# Altium PCB Copy of main - shifted.PcbDoc (part 14 of 15)
Units mil, origin at the board's own origin, x right, y up, seen from the top; angles counter-clockwise.
Board outline 8394.55 x 5164.44 mil, 7 copper layers (Top Layer 1, Layer 2, Layer 3, Unused, Layer 4_pow, Layer 5_gnd, Bottom 6+gnd), stack 46.112 mil thick; 363 components, 409 nets, 1750 pads, 991 vias.
Unrouted connection lines stored in the file: 111.
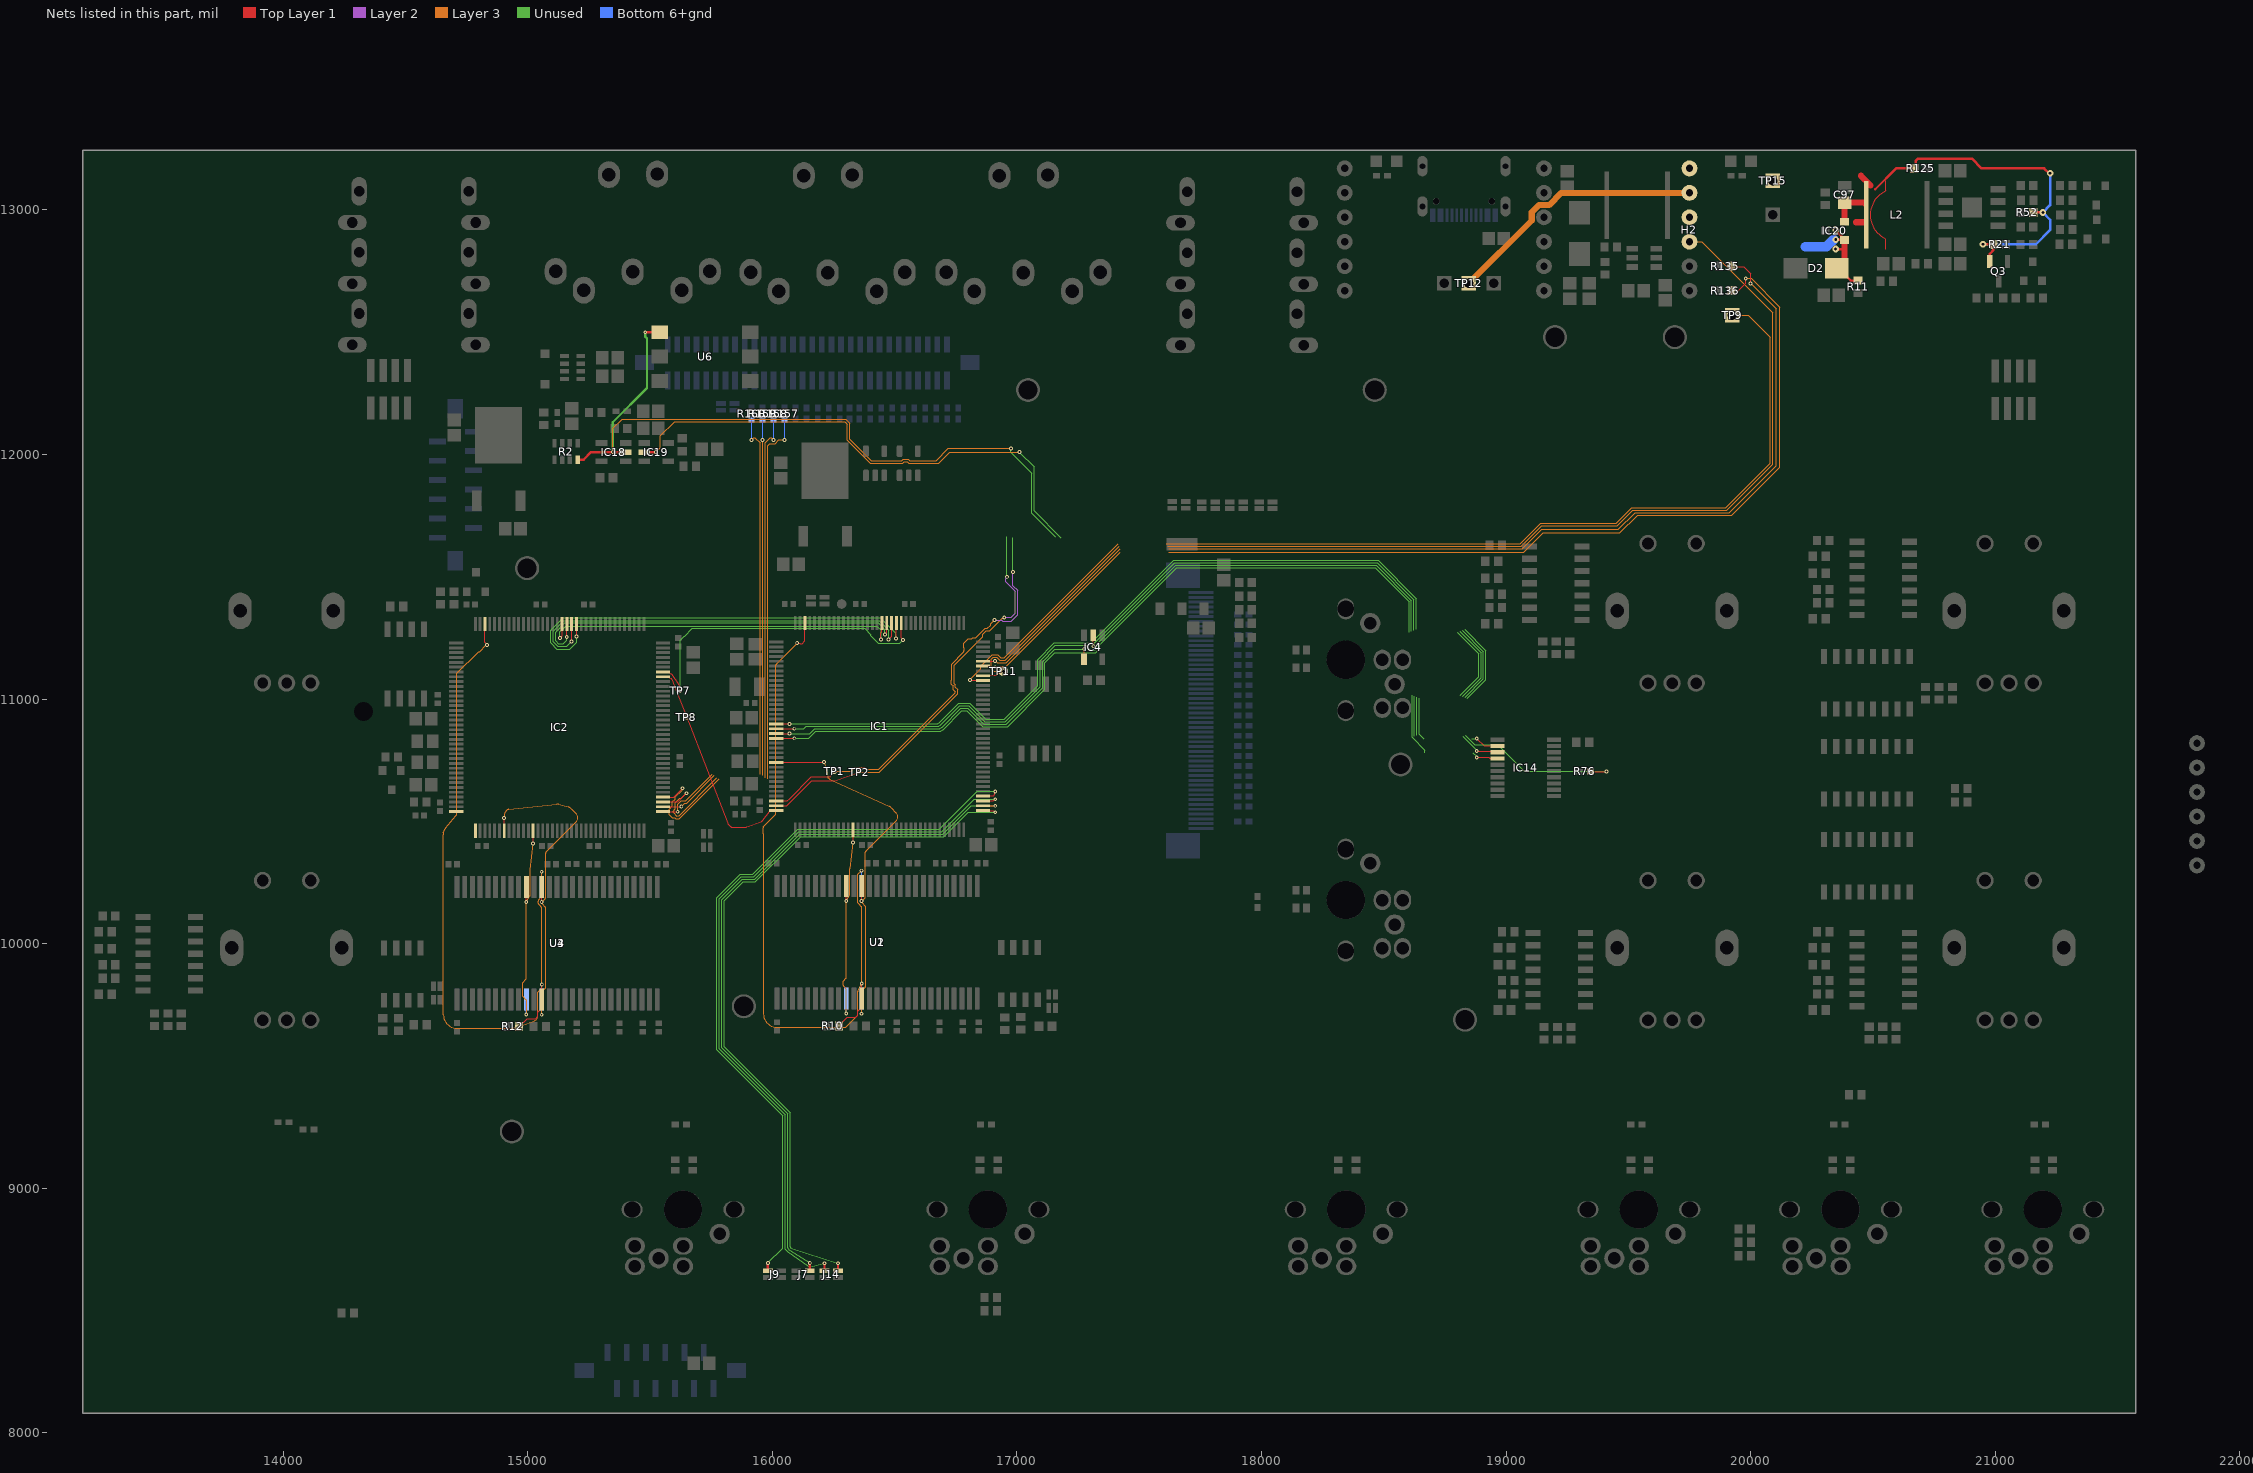
[diagram p17: the nets of this part, all layers, seen from the top]

## Via types
v1: diameter 15.75, hole 7.87, Top Layer 1 to Bottom 6+gnd, tented both sides, 923 vias
v2: diameter 27.56, hole 11.81, Top Layer 1 to Bottom 6+gnd, 45 vias
v3: diameter 23.62/23.62/23.62/23.62/23.62/23.62/23.62 (per signal layer), hole 12, Top Layer 1 to Bottom 6+gnd, tented top, 10 vias
v4: diameter 15.75, hole 7.87, Top Layer 1 to Bottom 6+gnd, 10 vias
v5: diameter 23.62/23.62/23.62/23.62/23.62/23.62/23.62 (per signal layer), hole 12, Top Layer 1 to Bottom 6+gnd, tented bottom, 3 vias

## Nets (pads, with @x,y where several pads share a name; then routed paths per layer and width w, separated by ;. In a path a pad name is that pad's centre, name@x,y a point inside that pad or via, vN(x,y) a via of type N, cw(c..) or ccw(c..) an arc to the next point about the centre after c; other vN are vias at no path point) (continued)
SDNRAS1_7: IC2.49 U3.18 U4.18 | length 997.4
  Top Layer 1 w5: v1@14993.87,10170.19 U3.18@14993.87,10232.03 ; v1(15021.64,10409.41) IC2.49@15021.61,10461.85
  Layer 3 w5: 14992.16,9771.24 14978.74,9784.66 14978.74,9840.83 14993.62,9855.72 v1(14993.62,10169.94) v1@14994.25,10171.08 ; v1(14993.62,9710.68) 14993.59,9767.73 ; v1@14994.31,10171.18 ccw(c14998.62,10168.64) v1@14994.25,10171.08 ; 15008.99,10197.52 15008.99,10301.7 ; v1(15021.64,10409.41) 15009.03,10302.29 ; 14992.19,9771.21 cw(c14988.59,9767.73) 14993.59,9767.73 ; 14992.19,9771.21 cw(c14988.59,9767.73) 14993.59,9767.73 ; 14992.19,9771.21 cw(c14988.59,9767.73) 14993.59,9767.73 ; 14992.19,9771.21 cw(c14988.59,9767.73) 14993.59,9767.73 ; 14992.19,9771.21 cw(c14988.59,9767.73) 14993.59,9767.73 ; 14992.19,9771.21 cw(c14988.59,9767.73) 14993.59,9767.73 ; 14992.19,9771.21 cw(c14988.59,9767.73) 14993.59,9767.73 ; 14992.19,9771.21 cw(c14988.59,9767.73) 14993.59,9767.73 ; 14992.19,9771.21 cw(c14988.59,9767.73) 14993.59,9767.73 ; 14992.19,9771.21 cw(c14988.59,9767.73) 14993.59,9767.73 ; 14992.19,9771.21 cw(c14988.59,9767.73) 14993.59,9767.73 ; 14992.19,9771.21 cw(c14988.59,9767.73) 14993.59,9767.73 ; 14992.19,9771.21 cw(c14988.59,9767.73) 14993.59,9767.73 ; 14992.19,9771.21 cw(c14988.59,9767.73) 14993.59,9767.73 ; 14992.19,9771.21 cw(c14988.59,9767.73) 14993.59,9767.73 ; 14992.18,9771.21 cw(c14988.59,9767.73) 14993.59,9767.73 ; v1@14994.25,10171.08 cw(c14998.62,10168.64) v1@14994.31,10171.17 ; v1@14994.25,10171.08 cw(c14998.62,10168.64) v1@14994.31,10171.17 ; v1@14994.25,10171.08 cw(c14998.62,10168.64) v1@14994.31,10171.17 ; v1@14994.25,10171.08 cw(c14998.62,10168.64) v1@14994.31,10171.17 ; v1@14994.25,10171.08 cw(c14998.62,10168.64) v1@14994.31,10171.17 ; v1@14994.25,10171.08 cw(c14998.62,10168.64) v1@14994.31,10171.17 ; v1@14994.25,10171.08 cw(c14998.62,10168.64) v1@14994.31,10171.17 ; v1@14994.25,10171.08 cw(c14998.62,10168.64) v1@14994.31,10171.17 ; v1@14994.25,10171.08 cw(c14998.62,10168.64) v1@14994.31,10171.17 ; v1@14994.25,10171.08 cw(c14998.62,10168.64) v1@14994.31,10171.17 ; v1@14994.25,10171.08 cw(c14998.62,10168.64) v1@14994.31,10171.17 ; v1@14994.25,10171.08 cw(c14998.62,10168.64) v1@14994.31,10171.17 ; v1@14994.25,10171.08 cw(c14998.62,10168.64) v1@14994.31,10171.17 ; v1@14994.25,10171.08 cw(c14998.62,10168.64) v1@14994.31,10171.17 ; v1@14994.25,10171.08 cw(c14998.62,10168.64) v1@14994.31,10171.17 ; v1@14994.31,10171.17 15008.31,10195.03 ; 15008.31,10195.03 ccw(c15003.99,10197.56) 15008.99,10197.47 ; 15008.31,10195.03 ccw(c15003.99,10197.56) 15008.99,10197.47 ; 15008.31,10195.03 ccw(c15003.99,10197.56) 15008.99,10197.47 ; 15008.31,10195.03 ccw(c15003.99,10197.56) 15008.99,10197.47 ; 15008.31,10195.03 ccw(c15003.99,10197.56) 15008.99,10197.47 ; 15008.31,10195.03 ccw(c15003.99,10197.56) 15008.99,10197.47 ; 15008.31,10195.03 ccw(c15003.99,10197.56) 15008.99,10197.47 ; 15008.31,10195.03 ccw(c15003.99,10197.56) 15008.99,10197.47 ; 15008.31,10195.03 ccw(c15003.99,10197.56) 15008.99,10197.47 ; 15008.31,10195.03 ccw(c15003.99,10197.56) 15008.99,10197.47 ; 15008.31,10195.03 ccw(c15003.99,10197.56) 15008.99,10197.47 ; 15008.31,10195.03 ccw(c15003.99,10197.56) 15008.99,10197.47 ; 15008.31,10195.03 ccw(c15003.99,10197.56) 15008.99,10197.47 ; 15008.31,10195.03 ccw(c15003.99,10197.56) 15008.99,10197.47 ; 15008.31,10195.03 ccw(c15003.99,10197.56) 15008.99,10197.47 ; 15008.31,10195.03 ccw(c15003.99,10197.56) 15008.99,10197.47 ; 15008.99,10301.7 cw(c15013.99,10301.7) 15009.03,10302.29 ; 15008.99,10301.7 cw(c15013.99,10301.7) 15009.03,10302.29 ; 15008.99,10301.7 cw(c15013.99,10301.7) 15009.03,10302.29 ; 15008.99,10301.7 cw(c15013.99,10301.7) 15009.03,10302.29 ; 15008.99,10301.7 cw(c15013.99,10301.7) 15009.03,10302.29 ; 15008.99,10301.7 cw(c15013.99,10301.7) 15009.03,10302.29 ; 15008.99,10301.7 cw(c15013.99,10301.7) 15009.03,10302.29 ; 15008.99,10301.7 cw(c15013.99,10301.7) 15009.03,10302.29 ; 15008.99,10301.7 cw(c15013.99,10301.7) 15009.03,10302.29 ; 15008.99,10301.7 cw(c15013.99,10301.7) 15009.03,10302.29 ; 15008.99,10301.7 cw(c15013.99,10301.7) 15009.03,10302.29 ; 15008.99,10301.7 cw(c15013.99,10301.7) 15009.03,10302.29 ; 15008.99,10301.7 cw(c15013.99,10301.7) 15009.03,10302.29 ; 15008.99,10301.7 cw(c15013.99,10301.7) 15009.03,10302.29 ; 15008.99,10301.7 cw(c15013.99,10301.7) 15009.03,10302.29 ; 15008.99,10301.7 cw(c15013.99,10301.7) 15009.03,10302.29
  Bottom 6+gnd w5: v1(14993.62,9710.68) 14993.62,9771.15 U4.18@14993.87,9771.4
SDNRAS_6: IC1.49 U1.18 U2.18 | length 1102.4
  Top Layer 1 w5: v1(16301.92,10174.13) U1.18@16301.92,10235.97 ; v1@16302.17,10174.38 U1.18@16302.17,10236.22 ; v1(16329.94,10413.6) IC1.49@16329.91,10466.04
  Layer 3 w5: v1(16301.92,9714.87) 16301.92,9812.06 ; 16301.92,9861.98 v1(16301.92,10174.13) v1@16302.55,10175.27 ; 16317.29,10201.71 16317.29,10305.89 ; v1(16329.94,10413.6) 16317.33,10306.48 ; 16300.64,9858.68 ccw(c16296.92,9862.02) 16301.92,9861.93 ; 16300.64,9858.68 ccw(c16296.92,9862.02) 16301.92,9861.93 ; 16300.64,9858.68 ccw(c16296.92,9862.02) 16301.92,9861.93 ; 16300.64,9858.68 ccw(c16296.92,9862.02) 16301.92,9861.93 ; 16300.64,9858.68 ccw(c16296.92,9862.02) 16301.92,9861.93 ; 16300.64,9858.68 ccw(c16296.92,9862.02) 16301.92,9861.93 ; 16300.64,9858.68 ccw(c16296.92,9862.02) 16301.92,9861.93 ; 16300.64,9858.68 ccw(c16296.92,9862.02) 16301.92,9861.93 ; 16300.64,9858.68 ccw(c16296.92,9862.02) 16301.92,9861.93 ; 16300.64,9858.68 ccw(c16296.92,9862.02) 16301.92,9861.93 ; 16300.64,9858.68 ccw(c16296.92,9862.02) 16301.92,9861.93 ; 16300.64,9858.68 ccw(c16296.92,9862.02) 16301.92,9861.93 ; 16300.64,9858.68 ccw(c16296.92,9862.02) 16301.92,9861.93 ; 16300.64,9858.68 ccw(c16296.92,9862.02) 16301.92,9861.93 ; 16300.64,9858.68 ccw(c16296.92,9862.02) 16301.92,9861.93 ; 16300.64,9858.68 ccw(c16296.92,9862.02) 16301.92,9861.93 ; 16300.64,9858.68 16290.99,9847.96 ccw(c16302.41,9837.68) 16290.44,9828.03 16300.81,9815.15 ; 16300.81,9815.15 cw(c16296.92,9812.02) 16301.92,9812.11 ; 16300.81,9815.15 cw(c16296.92,9812.02) 16301.92,9812.11 ; 16300.81,9815.15 cw(c16296.92,9812.02) 16301.92,9812.11 ; 16300.81,9815.15 cw(c16296.92,9812.02) 16301.92,9812.11 ; 16300.81,9815.15 cw(c16296.92,9812.02) 16301.92,9812.11 ; 16300.81,9815.15 cw(c16296.92,9812.02) 16301.92,9812.11 ; 16300.81,9815.15 cw(c16296.92,9812.02) 16301.92,9812.11 ; 16300.81,9815.15 cw(c16296.92,9812.02) 16301.92,9812.11 ; 16300.81,9815.15 cw(c16296.92,9812.02) 16301.92,9812.11 ; 16300.81,9815.15 cw(c16296.92,9812.02) 16301.92,9812.11 ; 16300.81,9815.15 cw(c16296.92,9812.02) 16301.92,9812.11 ; 16300.81,9815.15 cw(c16296.92,9812.02) 16301.92,9812.11 ; 16300.81,9815.15 cw(c16296.92,9812.02) 16301.92,9812.11 ; 16300.81,9815.15 cw(c16296.92,9812.02) 16301.92,9812.11 ; 16300.81,9815.15 cw(c16296.92,9812.02) 16301.92,9812.11 ; 16300.81,9815.15 cw(c16296.92,9812.02) 16301.92,9812.11 ; v1@16302.55,10175.27 cw(c16306.92,10172.83) v1@16302.61,10175.36 ; v1@16302.55,10175.27 cw(c16306.92,10172.83) v1@16302.61,10175.36 ; v1@16302.55,10175.27 cw(c16306.92,10172.83) v1@16302.61,10175.36 ; v1@16302.55,10175.27 cw(c16306.92,10172.83) v1@16302.61,10175.36 ; v1@16302.55,10175.27 cw(c16306.92,10172.83) v1@16302.61,10175.36 ; v1@16302.55,10175.27 cw(c16306.92,10172.83) v1@16302.61,10175.36 ; v1@16302.55,10175.27 cw(c16306.92,10172.83) v1@16302.61,10175.36 ; v1@16302.55,10175.27 cw(c16306.92,10172.83) v1@16302.61,10175.36 ; v1@16302.55,10175.27 cw(c16306.92,10172.83) v1@16302.61,10175.36 ; v1@16302.55,10175.27 cw(c16306.92,10172.83) v1@16302.61,10175.36 ; v1@16302.55,10175.27 cw(c16306.92,10172.83) v1@16302.61,10175.36 ; v1@16302.55,10175.27 cw(c16306.92,10172.83) v1@16302.61,10175.36 ; v1@16302.55,10175.27 cw(c16306.92,10172.83) v1@16302.61,10175.36 ; v1@16302.55,10175.27 cw(c16306.92,10172.83) v1@16302.61,10175.36 ; v1@16302.55,10175.27 cw(c16306.92,10172.83) v1@16302.61,10175.36 ; v1@16302.55,10175.27 cw(c16306.92,10172.83) v1@16302.61,10175.37 ; v1@16302.61,10175.36 16316.61,10199.22 ; 16316.61,10199.22 ccw(c16312.29,10201.75) 16317.29,10201.66 ; 16316.61,10199.22 ccw(c16312.29,10201.75) 16317.29,10201.66 ; 16316.61,10199.22 ccw(c16312.29,10201.75) 16317.29,10201.66 ; 16316.61,10199.22 ccw(c16312.29,10201.75) 16317.29,10201.66 ; 16316.61,10199.22 ccw(c16312.29,10201.75) 16317.29,10201.66 ; 16316.61,10199.22 ccw(c16312.29,10201.75) 16317.29,10201.66 ; 16316.61,10199.22 ccw(c16312.29,10201.75) 16317.29,10201.66 ; 16316.61,10199.22 ccw(c16312.29,10201.75) 16317.29,10201.66 ; 16316.61,10199.22 ccw(c16312.29,10201.75) 16317.29,10201.66 ; 16316.61,10199.22 ccw(c16312.29,10201.75) 16317.29,10201.66 ; 16316.61,10199.22 ccw(c16312.29,10201.75) 16317.29,10201.66 ; 16316.61,10199.22 ccw(c16312.29,10201.75) 16317.29,10201.66 ; 16316.61,10199.22 ccw(c16312.29,10201.75) 16317.29,10201.66 ; 16316.61,10199.22 ccw(c16312.29,10201.75) 16317.29,10201.66 ; 16316.61,10199.22 ccw(c16312.29,10201.75) 16317.29,10201.66 ; 16316.61,10199.22 ccw(c16312.29,10201.75) 16317.29,10201.66 ; 16317.29,10305.89 cw(c16322.29,10305.89) 16317.33,10306.48 ; 16317.29,10305.89 cw(c16322.29,10305.89) 16317.33,10306.48 ; 16317.29,10305.89 cw(c16322.29,10305.89) 16317.33,10306.48 ; 16317.29,10305.89 cw(c16322.29,10305.89) 16317.33,10306.48 ; 16317.29,10305.89 cw(c16322.29,10305.89) 16317.33,10306.48 ; 16317.29,10305.89 cw(c16322.29,10305.89) 16317.33,10306.48 ; 16317.29,10305.89 cw(c16322.29,10305.89) 16317.33,10306.48 ; 16317.29,10305.89 cw(c16322.29,10305.89) 16317.33,10306.48 ; 16317.29,10305.89 cw(c16322.29,10305.89) 16317.33,10306.48 ; 16317.29,10305.89 cw(c16322.29,10305.89) 16317.33,10306.48 ; 16317.29,10305.89 cw(c16322.29,10305.89) 16317.33,10306.48 ; 16317.29,10305.89 cw(c16322.29,10305.89) 16317.33,10306.48 ; 16317.29,10305.89 cw(c16322.29,10305.89) 16317.33,10306.48 ; 16317.29,10305.89 cw(c16322.29,10305.89) 16317.33,10306.48 ; 16317.29,10305.89 cw(c16322.29,10305.89) 16317.33,10306.48 ; 16317.29,10305.89 cw(c16322.29,10305.89) 16317.33,10306.48
  Bottom 6+gnd w5: v1(16301.92,9714.87) 16301.92,9775.34 U2.18@16302.17,9775.59
SDNWE1_7: IC2.43 U3.16 U4.16 | length 2368
  Top Layer 1 w5: IC2.43@14903.53,10461.87 v1@14903.47,10514.16 ; v1@15056.86,10170.19 U3.16@15056.86,10232.03
  Layer 3 w5: v1(14903.24,10514.39) 14908.2,10537.61 cw(c14923.24,10534.39) 14921.66,10549.69 15117.25,10569.87 cw(c15119.85,10544.63) 15126.2,10569.2 15165.81,10558.96 ; v1(15056.61,9709.31) 15056.61,9803 15072.73,9819.12 15072.73,10145.78 ; 15072.3,10187.7 15072.3,10369.91 cw(c15077.3,10369.91) 15073.75,10373.43 15196.8,10496.48 ; v1@15056.61,10167.87 ccw(c15061.61,10167.88) v1@15057.85,10164.58 ; v1@15056.61,10167.87 ccw(c15061.61,10167.88) v1@15057.85,10164.58 ; v1@15056.61,10167.87 ccw(c15061.61,10167.88) v1@15057.85,10164.58 ; v1@15056.61,10167.87 ccw(c15061.61,10167.88) v1@15057.85,10164.58 ; v1@15056.61,10167.87 ccw(c15061.61,10167.88) v1@15057.85,10164.58 ; v1@15056.61,10167.87 ccw(c15061.61,10167.88) v1@15057.85,10164.58 ; v1@15056.61,10167.87 ccw(c15061.61,10167.88) v1@15057.85,10164.58 ; v1@15056.61,10167.87 ccw(c15061.61,10167.88) v1@15057.85,10164.58 ; v1@15056.61,10167.87 ccw(c15061.61,10167.88) v1@15057.85,10164.58 ; v1@15056.61,10167.87 ccw(c15061.61,10167.88) v1@15057.85,10164.58 ; v1@15056.61,10167.87 ccw(c15061.61,10167.88) v1@15057.85,10164.58 ; v1@15056.61,10167.87 ccw(c15061.61,10167.88) v1@15057.85,10164.58 ; v1@15056.61,10167.87 ccw(c15061.61,10167.88) v1@15057.85,10164.58 ; v1@15056.61,10167.87 ccw(c15061.61,10167.88) v1@15057.85,10164.58 ; v1@15056.61,10167.87 ccw(c15061.61,10167.88) v1@15057.85,10164.58 ; v1@15056.61,10167.87 ccw(c15061.61,10167.88) v1@15057.85,10164.58 ; v1@15056.61,10167.87 v1(15056.61,10169.94) 15070.84,10184.22 ; v1@15057.85,10164.58 15071.49,10149.04 ; 15070.84,10184.22 ccw(c15067.3,10187.75) 15072.3,10187.66 ; 15070.84,10184.22 ccw(c15067.3,10187.75) 15072.3,10187.66 ; 15070.84,10184.22 ccw(c15067.3,10187.75) 15072.3,10187.66 ; 15070.84,10184.22 ccw(c15067.3,10187.75) 15072.3,10187.66 ; 15070.84,10184.22 ccw(c15067.3,10187.75) 15072.3,10187.66 ; 15070.84,10184.22 ccw(c15067.3,10187.75) 15072.3,10187.66 ; 15070.84,10184.22 ccw(c15067.3,10187.75) 15072.3,10187.66 ; 15070.84,10184.22 ccw(c15067.3,10187.75) 15072.3,10187.66 ; 15070.84,10184.22 ccw(c15067.3,10187.75) 15072.3,10187.66 ; 15070.84,10184.22 ccw(c15067.3,10187.75) 15072.3,10187.66 ; 15070.84,10184.22 ccw(c15067.3,10187.75) 15072.3,10187.66 ; 15070.84,10184.22 ccw(c15067.3,10187.75) 15072.3,10187.66 ; 15070.84,10184.22 ccw(c15067.3,10187.75) 15072.3,10187.66 ; 15070.84,10184.22 ccw(c15067.3,10187.75) 15072.3,10187.66 ; 15070.84,10184.22 ccw(c15067.3,10187.75) 15072.3,10187.66 ; 15070.84,10184.22 ccw(c15067.3,10187.75) 15072.3,10187.66 ; 15071.49,10149.04 cw(c15067.73,10145.74) 15072.73,10145.83 ; 15071.49,10149.04 cw(c15067.73,10145.74) 15072.73,10145.83 ; 15071.49,10149.04 cw(c15067.73,10145.74) 15072.73,10145.83 ; 15071.49,10149.04 cw(c15067.73,10145.74) 15072.73,10145.83 ; 15071.49,10149.04 cw(c15067.73,10145.74) 15072.73,10145.83 ; 15071.49,10149.04 cw(c15067.73,10145.74) 15072.73,10145.83 ; 15071.49,10149.04 cw(c15067.73,10145.74) 15072.73,10145.83 ; 15071.49,10149.04 cw(c15067.73,10145.74) 15072.73,10145.83 ; 15071.49,10149.04 cw(c15067.73,10145.74) 15072.73,10145.83 ; 15071.49,10149.04 cw(c15067.73,10145.74) 15072.73,10145.83 ; 15071.49,10149.04 cw(c15067.73,10145.74) 15072.73,10145.83 ; 15071.49,10149.04 cw(c15067.73,10145.74) 15072.73,10145.83 ; 15071.49,10149.04 cw(c15067.73,10145.74) 15072.73,10145.83 ; 15071.49,10149.04 cw(c15067.73,10145.74) 15072.73,10145.83 ; 15071.49,10149.04 cw(c15067.73,10145.74) 15072.73,10145.83 ; 15071.49,10149.04 cw(c15067.73,10145.74) 15072.73,10145.83 ; 15165.81,10558.96 cw(c15159.46,10534.39) 15177.69,10552.04 ; 15165.81,10558.96 cw(c15159.46,10534.39) 15177.69,10552.04 ; 15165.81,10558.96 cw(c15159.46,10534.39) 15177.69,10552.04 ; 15165.81,10558.96 cw(c15159.46,10534.39) 15177.69,10552.04 ; 15165.81,10558.96 cw(c15159.46,10534.39) 15177.69,10552.04 ; 15165.81,10558.96 cw(c15159.46,10534.39) 15177.69,10552.04 ; 15165.81,10558.96 cw(c15159.46,10534.39) 15177.69,10552.04 ; 15165.81,10558.96 cw(c15159.46,10534.39) 15177.69,10552.04 ; 15165.81,10558.96 cw(c15159.46,10534.39) 15177.69,10552.04 ; 15165.81,10558.96 cw(c15159.46,10534.39) 15177.69,10552.04 ; 15165.81,10558.96 cw(c15159.46,10534.39) 15177.69,10552.04 ; 15165.81,10558.96 cw(c15159.46,10534.39) 15177.69,10552.04 ; 15165.81,10558.96 cw(c15159.46,10534.39) 15177.69,10552.04 ; 15165.81,10558.96 cw(c15159.46,10534.39) 15177.69,10552.04 ; 15165.81,10558.96 cw(c15159.46,10534.39) 15177.69,10552.04 ; 15165.81,10558.96 cw(c15159.46,10534.39) 15177.69,10552.04 ; 15177.69,10552.04 15197.05,10532.04 ; 15196.8,10496.48 ccw(c15178.83,10514.39) 15197.05,10532.04 ; 15196.8,10496.48 ccw(c15178.83,10514.39) 15197.05,10532.04 ; 15196.8,10496.48 ccw(c15178.83,10514.39) 15197.05,10532.04 ; 15196.8,10496.48 ccw(c15178.83,10514.39) 15197.05,10532.04 ; 15196.8,10496.48 ccw(c15178.83,10514.39) 15197.05,10532.04 ; 15196.8,10496.48 ccw(c15178.83,10514.39) 15197.05,10532.04 ; 15196.8,10496.48 ccw(c15178.83,10514.39) 15197.05,10532.04 ; 15196.8,10496.48 ccw(c15178.83,10514.39) 15197.05,10532.04 ; 15196.8,10496.48 ccw(c15178.83,10514.39) 15197.05,10532.04 ; 15196.8,10496.48 ccw(c15178.83,10514.39) 15197.05,10532.04 ; 15196.8,10496.48 ccw(c15178.83,10514.39) 15197.05,10532.04 ; 15196.8,10496.48 ccw(c15178.83,10514.39) 15197.05,10532.04 ; 15196.8,10496.48 ccw(c15178.83,10514.39) 15197.05,10532.04 ; 15196.8,10496.48 ccw(c15178.83,10514.39) 15197.05,10532.04 ; 15196.8,10496.48 ccw(c15178.83,10514.39) 15197.05,10532.04 ; 15196.8,10496.48 ccw(c15178.83,10514.39) 15197.05,10532.05
  Bottom 6+gnd w5: v1@15056.86,9709.56 U4.16@15056.86,9771.4
SDNWE_6: IC1.26 U1.16 U2.16 | length 2408.3
  Top Layer 1 w5: IC1.26@16015.39,10741.18 16210.13,10741.2 v1(16211.04,10742.1) ; v1@16365.16,10174.38 U1.16@16365.16,10236.22
  Layer 3 w5: v1(16211.04,10742.1) 16225.31,10683.52 ccw(c16240.24,10687.2) 16233.85,10673.22 16478.29,10561.67 cw(c16467.76,10538.58) 16485.98,10556.24 16505.35,10536.23 ; v1(16364.91,9713.5) 16364.91,9805.11 cw(c16369.91,9805.12) 16366.36,9808.63 16379.58,9821.89 ; v1@16366.14,10168.77 16379.79,10153.23 ; 16380.6,10191.89 16380.6,10374.1 cw(c16385.6,10374.1) 16382.05,10377.62 16505.1,10500.67 ; 16381.03,9825.38 16381.03,10149.97 ; v1@16364.91,10172.06 ccw(c16369.91,10172.06) v1@16366.14,10168.78 ; v1@16364.91,10172.06 ccw(c16369.91,10172.06) v1@16366.14,10168.78 ; v1@16364.91,10172.06 ccw(c16369.91,10172.06) v1@16366.14,10168.78 ; v1@16364.91,10172.06 ccw(c16369.91,10172.06) v1@16366.14,10168.78 ; v1@16364.91,10172.06 ccw(c16369.91,10172.06) v1@16366.14,10168.78 ; v1@16364.91,10172.06 ccw(c16369.91,10172.06) v1@16366.14,10168.78 ; v1@16364.91,10172.06 ccw(c16369.91,10172.06) v1@16366.14,10168.78 ; v1@16364.91,10172.06 ccw(c16369.91,10172.06) v1@16366.14,10168.78 ; v1@16364.91,10172.06 ccw(c16369.91,10172.06) v1@16366.14,10168.78 ; v1@16364.91,10172.06 ccw(c16369.91,10172.06) v1@16366.14,10168.78 ; v1@16364.91,10172.06 ccw(c16369.91,10172.06) v1@16366.14,10168.78 ; v1@16364.91,10172.06 ccw(c16369.91,10172.06) v1@16366.14,10168.78 ; v1@16364.91,10172.06 ccw(c16369.91,10172.06) v1@16366.14,10168.78 ; v1@16364.91,10172.06 ccw(c16369.91,10172.06) v1@16366.14,10168.78 ; v1@16364.91,10172.06 ccw(c16369.91,10172.06) v1@16366.14,10168.78 ; v1@16364.91,10172.06 ccw(c16369.91,10172.06) v1@16366.14,10168.78 ; v1@16364.91,10172.06 v1(16364.91,10174.13) 16379.14,10188.41 ; 16379.14,10188.41 ccw(c16375.6,10191.94) 16380.6,10191.85 ; 16379.14,10188.41 ccw(c16375.6,10191.94) 16380.6,10191.85 ; 16379.14,10188.41 ccw(c16375.6,10191.94) 16380.6,10191.85 ; 16379.14,10188.41 ccw(c16375.6,10191.94) 16380.6,10191.85 ; 16379.14,10188.41 ccw(c16375.6,10191.94) 16380.6,10191.85 ; 16379.14,10188.41 ccw(c16375.6,10191.94) 16380.6,10191.85 ; 16379.14,10188.41 ccw(c16375.6,10191.94) 16380.6,10191.85 ; 16379.14,10188.41 ccw(c16375.6,10191.94) 16380.6,10191.85 ; 16379.14,10188.41 ccw(c16375.6,10191.94) 16380.6,10191.85 ; 16379.14,10188.41 ccw(c16375.6,10191.94) 16380.6,10191.85 ; 16379.14,10188.41 ccw(c16375.6,10191.94) 16380.6,10191.85 ; 16379.14,10188.41 ccw(c16375.6,10191.94) 16380.6,10191.85 ; 16379.14,10188.41 ccw(c16375.6,10191.94) 16380.6,10191.85 ; 16379.14,10188.41 ccw(c16375.6,10191.94) 16380.6,10191.85 ; 16379.14,10188.41 ccw(c16375.6,10191.94) 16380.6,10191.85 ; 16379.14,10188.41 ccw(c16375.6,10191.94) 16380.6,10191.85 ; 16379.58,9821.89 ccw(c16376.03,9825.42) 16381.03,9825.33 ; 16379.58,9821.89 ccw(c16376.03,9825.42) 16381.03,9825.33 ; 16379.58,9821.89 ccw(c16376.03,9825.42) 16381.03,9825.33 ; 16379.58,9821.89 ccw(c16376.03,9825.42) 16381.03,9825.33 ; 16379.58,9821.89 ccw(c16376.03,9825.42) 16381.03,9825.33 ; 16379.58,9821.89 ccw(c16376.03,9825.42) 16381.03,9825.33 ; 16379.58,9821.89 ccw(c16376.03,9825.42) 16381.03,9825.33 ; 16379.58,9821.89 ccw(c16376.03,9825.42) 16381.03,9825.33 ; 16379.58,9821.89 ccw(c16376.03,9825.42) 16381.03,9825.33 ; 16379.58,9821.89 ccw(c16376.03,9825.42) 16381.03,9825.33 ; 16379.58,9821.89 ccw(c16376.03,9825.42) 16381.03,9825.33 ; 16379.58,9821.89 ccw(c16376.03,9825.42) 16381.03,9825.33 ; 16379.58,9821.89 ccw(c16376.03,9825.42) 16381.03,9825.33 ; 16379.58,9821.89 ccw(c16376.03,9825.42) 16381.03,9825.33 ; 16379.58,9821.89 ccw(c16376.03,9825.42) 16381.03,9825.33 ; 16379.58,9821.89 ccw(c16376.03,9825.42) 16381.03,9825.33 ; 16379.79,10153.23 cw(c16376.03,10149.93) 16381.03,10150.02 ; 16379.79,10153.23 cw(c16376.03,10149.93) 16381.03,10150.02 ; 16379.79,10153.23 cw(c16376.03,10149.93) 16381.03,10150.02 ; 16379.79,10153.23 cw(c16376.03,10149.93) 16381.03,10150.02 ; 16379.79,10153.23 cw(c16376.03,10149.93) 16381.03,10150.02 ; 16379.79,10153.23 cw(c16376.03,10149.93) 16381.03,10150.02 ; 16379.79,10153.23 cw(c16376.03,10149.93) 16381.03,10150.02 ; 16379.79,10153.23 cw(c16376.03,10149.93) 16381.03,10150.02 ; 16379.79,10153.23 cw(c16376.03,10149.93) 16381.03,10150.02 ; 16379.79,10153.23 cw(c16376.03,10149.93) 16381.03,10150.02 ; 16379.79,10153.23 cw(c16376.03,10149.93) 16381.03,10150.02 ; 16379.79,10153.23 cw(c16376.03,10149.93) 16381.03,10150.02 ; 16379.79,10153.23 cw(c16376.03,10149.93) 16381.03,10150.02 ; 16379.79,10153.23 cw(c16376.03,10149.93) 16381.03,10150.02 ; 16379.79,10153.23 cw(c16376.03,10149.93) 16381.03,10150.02 ; 16379.79,10153.23 cw(c16376.03,10149.93) 16381.03,10150.02 ; 16505.1,10500.67 ccw(c16487.13,10518.58) 16505.35,10536.24 ; 16505.1,10500.67 ccw(c16487.13,10518.58) 16505.35,10536.23 ; 16505.1,10500.67 ccw(c16487.13,10518.58) 16505.35,10536.23 ; 16505.1,10500.67 ccw(c16487.13,10518.58) 16505.35,10536.23 ; 16505.1,10500.67 ccw(c16487.13,10518.58) 16505.35,10536.23 ; 16505.1,10500.67 ccw(c16487.13,10518.58) 16505.35,10536.23 ; 16505.1,10500.67 ccw(c16487.13,10518.58) 16505.35,10536.23 ; 16505.1,10500.67 ccw(c16487.13,10518.58) 16505.35,10536.23 ; 16505.1,10500.67 ccw(c16487.13,10518.58) 16505.35,10536.23 ; 16505.1,10500.67 ccw(c16487.13,10518.58) 16505.35,10536.23 ; 16505.1,10500.67 ccw(c16487.13,10518.58) 16505.35,10536.23 ; 16505.1,10500.67 ccw(c16487.13,10518.58) 16505.35,10536.23 ; 16505.1,10500.67 ccw(c16487.13,10518.58) 16505.35,10536.23 ; 16505.1,10500.67 ccw(c16487.13,10518.58) 16505.35,10536.23 ; 16505.1,10500.67 ccw(c16487.13,10518.58) 16505.35,10536.23 ; 16505.1,10500.67 ccw(c16487.13,10518.58) 16505.35,10536.23
  Bottom 6+gnd w5: v1@16365.16,9713.75 U2.16@16365.16,9775.59
SPI1_MISO: IC1.124 IC2.124 | length 1725.5
  Top Layer 1 w5: v1(15179.1,11234.85) IC2.124@15179.12,11307.38 ; v1(16475.36,11243.72) 16475.36,11245 16487.36,11257 IC1.124@16487.36,11311.57
  Unused w5: v1(15179.1,11234.85) 15178,11234.85 15158.89,11215.74 15122.08,11215.74 15103.15,11234.68 15103.15,11277.96 15146.36,11321.17 16436.86,11321.17 16475.52,11282.5 16475.52,11243.88 v1(16475.36,11243.72)
SPI1_MOSI: IC1.123 IC2.123 | length 1802.5
  Top Layer 1 w5: IC2.123@15198.81,11307.38 15199.05,11307.15 15199.05,11255.5 v1(15199.28,11255.26) ; v1(16505.24,11247.2) 16506.14,11248.11 16506.14,11310.67 IC1.123@16507.05,11311.57
  Unused w5: v1(15199.28,11255.26) 15199.28,11232.05 15171.95,11204.72 15118.97,11204.72 15093.15,11230.53 15093.15,11282.1 15144.29,11333.24 16441.86,11333.24 16505.24,11269.86 v1(16505.24,11247.2)
SPI1_NSS: IC1.125 IC2.125 | length 1601.7
  Top Layer 1 w5: v1(15159.12,11254.61) 15159.28,11254.77 15159.28,11307.23 IC2.125@15159.44,11307.38 ; v1(16460.15,11264.49) 16460.15,11265.71 16467.68,11273.24 IC1.125@16467.68,11311.57
  Unused w5: v1(15159.12,11254.61) 15159.12,11240.61 15145.55,11227.04 15124.93,11227.04 15113.15,11238.82 15113.15,11273.82 15150.5,11311.17 16432.71,11311.17 16459.79,11284.09 16459.79,11264.85 v1(16460.15,11264.49)
SPI1_SCK: IC1.126 IC2.126 | length 1523.1
  Top Layer 1 w5: v1(15131.48,11250.26) 15139.75,11258.53 IC2.126@15139.75,11307.38 ; v1(16444.2,11244.02) 16443.33,11244.89 16443.33,11270.38 16447.99,11275.04 IC1.126@16447.99,11311.57
  Unused w5: v1(15131.48,11250.26) 15131.48,11274.69 15155.61,11298.82 16427.6,11298.82 16444.78,11281.64 16444.78,11244.6 v1(16444.2,11244.02)
SPI2_ext.MISO_1: IC1.75 J14.2 | length 3111.9
  Top Layer 1 w5: IC1.75@16860.91,10583.7 16903.17,10583.7 16909.87,10590.4 v1(16911.15,10590.4)
  Top Layer 1 w10: J14.2@16213.15,8661.38 v1@16213.15,8693.12
  Unused w5: v1(16212.92,8693.35) 16156.55,8679.63 cw(c16152.92,8694.57) 16143.96,8682.08 16063.58,8739.72 cw(c16078.15,8760.03) 16061.2,8741.66 16054.76,8747.6 cw(c16058.15,8751.27) 16053.15,8751.27 16053.15,9300.53 15783.15,9570.53 15783.15,10184.25 15872.72,10273.82 15923.47,10273.82 16070.58,10420.93 16070.79,10420.93 16107.03,10457.17 16691.5,10457.17 16824.73,10590.4 v1(16911.15,10590.4)
SPI2_ext.MOSI_1: IC1.76 J9.4 | length 3044.7
  Top Layer 1 w5: IC1.76@16860.91,10603.38 16863.03,10605.51 16904.46,10605.51 16909.09,10610.14 16909.09,10620.51 v1(16911.15,10622.57)
  Top Layer 1 w10: J9.4@15981.81,8662.72 v1@15981.81,8694.46
  Unused w5: v1(15981.58,8694.69) 16041.68,8754.82 ccw(c16038.15,8758.36) 16043.15,8758.36 16043.15,9296.39 15773.15,9566.39 15773.15,10188.39 15868.58,10283.82 15919.33,10283.82 16066.44,10430.93 16066.65,10430.93 16102.89,10467.17 16681.5,10467.17 16836.9,10622.57 v1(16911.15,10622.57)
SPI2_ext.NSS_1: IC1.73 J14.4 | length 3077.8
  Top Layer 1 w5: IC1.73@16860.91,10544.33 16903.56,10544.33 16910.64,10537.25 v1(16911.15,10537.25)
  Top Layer 1 w10: J14.4@16268.27,8661.38 v1@16268.27,8693.12
  Unused w5: v1(16268.03,8693.35) 16076.59,8755.28 cw(c16078.15,8760.03) 16073.15,8760.03 16073.15,9308.82 15803.15,9578.82 15803.15,10175.96 15880.08,10252.9 15930.83,10252.9 16078.86,10400.93 16079.07,10400.93 16115.32,10437.17 16700.65,10437.17 16800.72,10537.25 v1(16911.15,10537.25)
SPI2_ext.SCK_1: IC1.74 J7.4 | length 3004.6
  Top Layer 1 w5: IC1.74@16860.91,10564.01 16861.06,10563.86 16910.99,10563.86 v1(16911.15,10563.7)
  Top Layer 1 w10: J7.4@16153.15,8662.6 v1@16153.15,8694.34
  Unused w5: v1(16152.92,8694.57) 16070.09,8747.38 cw(c16078.15,8760.03) 16067.57,8749.4 16064.6,8752.37 cw(c16068.15,8755.89) 16063.15,8755.89 16063.15,9304.68 15793.15,9574.68 15793.15,10180.11 15876.86,10263.82 15927.61,10263.82 16074.72,10410.93 16074.93,10410.93 16111.18,10447.17 16696.5,10447.17 16813.04,10563.7 v1(16911.15,10563.7)
SPI2_MISO: IC2.75 R158.1 | length 1969.1
  Top Layer 1 w5: IC2.75@15552.67,10579.51 15612.66,10579.51 v1(15648.15,10615)
  Layer 3 w5: v1(15648.15,10615) 15628.15,10595 15621.08,10595 15613.15,10587.07 15613.15,10586.99 15602.7,10576.55 15602.7,10571.73 15602.13,10571.16 15602.13,10550.74 15593.59,10542.21 15593.59,10536.77 15609.48,10520.88 15612.62,10524.03 15619.07,10524.03 15773.15,10678.11 ; 15970,10678.11 15970,12048.26 15991.3,12069.56 15995.44,12069.56 v1(16005,12060)
  Bottom 6+gnd w5: v1(16005,12060) R158.1@16005,12144.72
SPI2_MOSI: IC2.76 R157.1 | length 2031.6
  Top Layer 1 w5: IC2.76@15552.67,10599.2 15597.35,10599.2 15632.7,10634.55 v1(15632.7,10635.6)
  Layer 3 w5: v1(15632.7,10635.6) 15630.64,10633.54 15630.64,10627.49 15603.15,10600 15603.15,10591.14 15591.52,10579.51 15591.52,10563.37 15578.15,10550 15578.15,10528.08 15591.52,10514.71 15601.51,10514.71 15605.34,10510.88 15620.07,10510.88 15783.15,10673.97 ; 15980,10673.97 15980,12035 15989.63,12044.63 16011.37,12044.63 16026.74,12060 v1(16050,12060)
  Bottom 6+gnd w5: v1(16050,12060) R157.1@16050,12144.72
SPI2_NSS: IC2.73 R160.1 | length 1770.4
  Top Layer 1 w5: IC2.73@15552.67,10540.14 15611.96,10540.14 v1(15612.7,10539.4)
  Layer 3 w5: v1(15612.7,10539.4) 15612.7,10553.71 15612.13,10554.28 15612.13,10567.02 15612.7,10567.59 15612.7,10569.55 15628.15,10585 15645.31,10585 15753.15,10692.84 ; v1(15915,12060) 15924.56,12069.56 15928.7,12069.56 15950,12048.26 15950,10692.84
  Bottom 6+gnd w5: v1(15915,12060) R160.1@15915,12144.72
SPI2_SCK: IC2.74 R159.1 | length 1719.9
  Top Layer 1 w5: IC2.74@15552.67,10559.83 15553.08,10560.24 15627.09,10560.24 v1(15627.5,10560.65)
  Layer 3 w5: v1(15627.5,10560.65) 15641.85,10575 15649.45,10575 15763.15,10688.7 ; 15960,10688.7 v1(15960,12060)
  Bottom 6+gnd w5: v1(15960,12060) R159.1@15960,12144.72
SPI5_MISO: IC1.20 IC4.4 | length 1561.4
  Top Layer 1 w5: IC1.20@16015.47,10859.22 v1@16070.35,10859.22 ; IC4.4@17274.13,11162.52 17274.13,11203.36 v1(17275.36,11204.59)
  Unused w5: v1(16070.42,10859.14) 16153.03,10859.14 16172.4,10878.51 16685.18,10878.51 16691.7,10885.04 16693.51,10885.04 16770.82,10962.34 16799.41,10962.34 16863.88,10897.86 16955.48,10897.86 17104.44,11046.82 17104.44,11153.51 17155.51,11204.59 v1(17275.36,11204.59)
SPI5_MOSI: IC1.21 IC14.4 | length 3881.6
  Top Layer 1 w5: IC1.21@16015.39,10839.61 v1(16089.53,10839.64) ; v1(18880,10761.57) 18928.42,10761.57 18932.79,10757.2 IC14.4@18964.33,10757.2
  Unused w5: v1(16089.53,10839.64) 16147.68,10839.64 16176.55,10868.51 16689.32,10868.51 16695.84,10875.04 16697.65,10875.04 16774.96,10952.34 16795.26,10952.34 16859.74,10887.86 16962.8,10887.86 17114.44,11039.51 17114.44,11149.37 17154.15,11189.09 17322.5,11189.09 17338.94,11205.53 17338.94,11223.04 17653.84,11537.94 18464.03,11537.94 18603.15,11398.82 18603.15,11273.06 ; 18615.28,11015.33 18615.28,10844.26 18667.78,10791.77 18667.78,10780.95 ; 18800,11273.06 18887.48,11185.58 18887.48,11090.67 18812.13,11015.33 ; 18864.63,10780.95 18880,10765.58 v1(18880,10761.57)
SPI5_NSS: IC1.18 IC14.2 | length 3840.1
  Top Layer 1 w5: IC1.18@16015.39,10898.66 16015.47,10898.59 16070.35,10898.59 v1(16070.42,10898.51) ; v1(18880,10838.82) 18910.43,10808.38 IC14.2@18964.33,10808.38
  Unused w5: v1(16070.42,10898.51) 16676.9,10898.51 16683.42,10905.04 16685.23,10905.04 16762.53,10982.34 16807.69,10982.34 16872.17,10917.86 16947.2,10917.86 17084.44,11055.11 17084.44,11161.8 17152.6,11229.96 17303.44,11229.96 17641.41,11567.94 18476.46,11567.94 18633.15,11411.25 18633.15,11285.48 ; 18645.28,11002.9 18645.28,10856.68 18663.15,10838.82 ; 18830,11285.48 18917.48,11198.01 18917.48,11078.24 18842.13,11002.9 ; 18860,10838.82 v1(18880,10838.82)
SPI5_SCK: IC1.19 IC14.3 | length 3871.6
  Top Layer 1 w5: IC1.19@16015.39,10878.98 v1(16089.53,10879.01) ; v1(18880,10787.32) 18959.8,10787.32 IC14.3@18964.33,10782.79
  Unused w5: v1(16089.53,10879.01) 16129.05,10879.01 16138.55,10888.51 16681.04,10888.51 16687.56,10895.04 16689.37,10895.04 16766.67,10972.34 16803.55,10972.34 16868.03,10907.86 16951.34,10907.86 17094.44,11050.96 17094.44,11157.66 17156.74,11219.96 17281.73,11219.96 17302.61,11199.09 17318.36,11199.09 17328.94,11209.67 17328.94,11227.19 17649.7,11547.94 18468.17,11547.94 18613.15,11402.96 18613.15,11277.2 ; 18625.28,10848.4 18625.28,11011.19 ; 18810,11277.2 18897.48,11189.72 18897.48,11086.53 18822.13,11011.19 ; 18822.13,10848.4 18880,10790.53 v1(18880,10787.32)
UART1_RX: IC1.122 IC2.102 TP7.1 | length 1359.8
  Top Layer 1 w5: IC2.102@15552.67,11111.01 15579.2,11107.6 15585.65,11103.6 cw(c15581.7,11097.23) 15587.8,11101.6 15615.64,11062.78 cw(c15603.15,11053.82) 15618.18,11057.03 v1(15623.15,11033.82) ; IC1.122@16526.73,11311.57 16526.73,11249.86 v1(16534.45,11242.15)
  Unused w5: v1(15623.15,11033.82) 15623.15,11240.67 15640.12,11257.63 15641.96,11257.63 15673.15,11288.82 16378.15,11288.82 16403.15,11263.82 16403.15,11258.4 16433.21,11228.34 16520.64,11228.34 v1(16534.45,11242.15)
UART1_TX: IC1.36 IC2.101 TP8.1 | length 899.1
  Top Layer 1 w5: IC2.101@15552.67,11091.32 15579.2,11087.92 15585.65,11083.92 cw(c15581.7,11077.54) 15588.7,11080.25 15608.81,11028.27 15648.85,10925.27 15817.44,10491.58 ccw(c15826.76,10495.21) 15819.69,10488.14 15828.41,10479.41 ccw(c15835.48,10486.49) 15835.48,10476.49 15890.82,10476.49 ccw(c15890.82,10486.49) 15894.3,10477.11 15953.72,10499.18 ccw(c15948.37,10513.6) 15960.55,10504.21 15988.86,10540.93 IC1.36@16015.39,10544.33
  other v1: 15648.15,10925
UART2_RX: IC2.37
UART2_TX: IC2.36
UART4_RX: IC1.35 IC18.2 R2.4 TP2.1 U6.4 | length 4849.6
  Top Layer 1 w5: IC1.35@16015.39,10564.01 16058.45,10564.01 16160.16,10665.72 16252.41,10665.72 ; 16254.38,10666.12 v1(16355.24,10701.2)
  Top Layer 1 w10: R2.4@15203.45,11978.65 15227.74,11978.65 15258.8,12009.71 v1(15347.23,12009.71) IC18.2@15399.63,12009.71 ; v1(15480,12500) U6.4@15539.96,12500
  Layer 2 w5: v1(16948.15,11333.82) 16976.97,11333.82 16993.15,11350 16993.15,11440 16953.15,11480 16953.15,11491.7 16958.9,11497.44 v1(16958.9,11500)
  Unused w5: v1(16958.9,11500) 16958.9,11664.25 ; v1(16975,12025) 16975,12009.03 17060,11924.03 17060,11760 17155.75,11664.25
  Unused w10: v1(15347.23,12009.71) 15347.23,12132.23 15487.25,12272.25 15487.25,12475.08 15480,12482.33 v1(15480,12500)
  Layer 3 w5: v1(15347.23,12009.71) 15347.23,12107.11 15385.12,12145 16300,12145 16316.9,12128.1 16316.9,12063.1 16405,11975 16529.12,11975 16534.49,11980.37 16555.51,11980.37 16560.88,11975 16670,11975 16720,12025 v1(16975,12025) ; v1(16355.24,10701.2) 16436.39,10701.2 16756.94,11021.75 16756.94,11040.89 16748.49,11049.33 16748.49,11057.98 16743.15,11063.32 16743.15,11138.82 16859.86,11255.53 16859.86,11264.57 16874.11,11278.82 16889.47,11278.82 16940.44,11329.79 16941.21,11329.79 16945.24,11333.82 v1(16948.15,11333.82)
UART4_TX: IC1.34 IC19.2 TP1.1 | length 3916.3
  Top Layer 1 w5: IC1.34@16015.39,10583.7 16060.99,10583.7 16070.12,10592.83 16159.49,10682.2 16232.89,10682.2 ccw(c16232.89,10687.2) 16236.74,10684.01 TP1.1@16252.63,10703.14
  Top Layer 1 w10: IC19.2@15476.2,12009.71 15522.67,12009.71 v1(15523.34,12010.38)
  Layer 2 w5: v1(16907.44,11323.07) 16937.15,11323.07 16941.78,11318.44 16975.74,11318.44 17003.15,11345.86 17003.15,11444.14 16983.15,11464.14 v1(16983.15,11520)
  Unused w5: v1(16983.15,11520) 16983.15,11660 ; v1(17010,12010) 17070,11950 17070,11770 17180,11660
  Layer 3 w5: v1(15523.34,12010.38) 15541.58,12028.61 15541.58,12076.58 15600,12135 16295.86,12135 16306.9,12123.96 16306.9,12058.1 16400,11965 16533.26,11965 16538.63,11970.37 16551.37,11970.37 16556.74,11965 16680,11965 16725,12010 16968.26,12010 16968.63,12009.63 16981.37,12009.63 16981.74,12010 v1(17010,12010) ; v3(16253.24,10705.2) 16322.7,10705.2 16339.5,10722.01 16375.27,10722.01 16383.46,10713.82 16434.87,10713.82 16746.94,11025.89 16746.94,11030.03 16738.49,11038.48 16738.49,11053.84 16731.91,11060.41 16731.91,11077.58 16733.15,11078.82 16733.15,11142.96 16783.15,11192.96 16783.15,11197.08 16783.52,11197.45 16783.52,11210.19 16783.15,11210.56 16783.15,11228.89 16800.97,11246.7 16815.14,11246.7 16818.92,11250.48 16831.49,11250.48 16869.82,11288.82 16879.01,11288.82 16892.2,11302.01 16892.2,11307.83 v1(16907.44,11323.07)
UDQM1_7: IC2.142 R12.2 U3.39 U4.39 | length 3013
  Top Layer 1 w5: IC2.142@14824.79,11307.32 14824.79,11232.6 14833.22,11224.17 v1(14833.22,11221.26) ; R12.2@14963.67,9659.63 R12.2@14963.73,9661.6 14965.64,9661.6 14997.98,9693.94 15031.59,9693.94 15040.6,9702.94 15040.6,9720.14 15056.86,9736.4 15056.86,9771.4 v1@15056.86,9833.24
  Layer 3 w5: 14709.85,11090.76 14709.85,10533.22 cw(c14704.85,10533.23) 14709.84,10532.85 14709.78,10532.11 cw(c14694.82,10533.22) 14706.2,10523.44 14664.2,10474.26 ccw(c14698.42,10445.04) 14654.48,10454.74 14653.98,10452.49 ccw(c14678.4,10447.09) 14653.4,10447.16 14653.4,10444.98 14653.7,10444.62 cw(c14649.9,10441.38) 14654.9,10441.41 14654.9,9709.35 ccw(c14710.27,9709.43) 14710.23,9654.05 14741.53,9653.94 ccw(c14741.61,9673.94) 14741.61,9653.94 14867.75,9653.94 ; 14709.85,11090.81 14709.85,11105.49 14798.75,11194.39 14803.45,11194.39 14830.31,11221.26 v1(14833.22,11221.26) ; 14867.78,9653.94 14930.75,9654.1 ccw(c14930.63,9709.47) 14947.96,9656.88 14976.31,9666.21 ccw(c14962.12,9709.31) 14977.27,9666.54 15024.54,9683.27 ccw(c15016.55,9705.96) 15040.6,9705.74 15040.6,9801.12 15057.1,9817.63 v1(15057.1,9833.49) 15057.1,10145.68 ccw(c15052.1,10145.59) 15055.65,10149.12 15045.72,10159.1 cw(c15056.61,10169.94) 15045.09,10180.12 15055.85,10192.29 ccw(c15052.1,10195.6) 15057.1,10195.51 ; v1(15056.61,10294.12) 15057.1,10293.63 15057.1,10195.56
  Bottom 6+gnd w5: U4.39@15056.86,10232.03 v1@15056.86,10293.87
UDQM_6: IC1.142 R10.2 U1.39 U2.39 | length 4556.5
  Top Layer 1 w5: v1(16101.39,11229.33) 16101.89,11228.82 16111.81,11228.82 16114.31,11226.32 16121.74,11226.32 16133.03,11237.61 16133.03,11311.46 IC1.142@16133.09,11311.51 ; R10.2@16271.97,9663.82 16271.97,9665.79 16286.2,9680.02 16288.17,9680.02 16306.28,9698.13 16339.89,9698.13 16348.9,9707.13 16348.9,9724.33 16365.16,9740.59 U1.39@16365.16,9775.59 v1@16365.16,9837.43
  Layer 3 w5: 15961.7,10450.26 15963.2,9713.53 ; 15961.7,10450.28 15961.7,10470.68 cw(c15976.7,10470.68) 15961.7,10470.79 15961.72,10474.89 ; v1(16101.39,11229.33) 16015.26,11141.48 ccw(c16018.83,11137.98) 16013.83,11137.98 16013.83,10529.03 15963.16,10478.36 ; 16288.79,9657.93 16284.64,9657.93 16049.75,9658.13 16018.36,9658.24 ; 16288.84,9657.93 16297.67,9657.96 ; v1(16364.91,10298.31) 16349.54,10282.93 16349.54,10168.26 ; 16365.4,10148.25 v1(16365.4,9837.68) cw(c16360.4,9837.68) 16364.85,9835.38 16349.45,9805.53 ccw(c16353.9,9803.24) 16348.9,9803.24 16348.9,9707.13 16301.16,9659.4 ; 15961.72,10474.89 cw(c15966.72,10474.85) 15963.14,10478.34 ; 15961.72,10474.89 cw(c15966.72,10474.85) 15963.14,10478.34 ; 15961.72,10474.89 cw(c15966.72,10474.85) 15963.14,10478.34 ; 15961.72,10474.89 cw(c15966.72,10474.85) 15963.14,10478.34 ; 15961.72,10474.89 cw(c15966.72,10474.85) 15963.14,10478.34 ; 15961.72,10474.89 cw(c15966.72,10474.85) 15963.14,10478.34 ; 15961.72,10474.89 cw(c15966.72,10474.85) 15963.14,10478.34 ; 15961.72,10474.89 cw(c15966.72,10474.85) 15963.14,10478.34 ; 15961.72,10474.89 cw(c15966.72,10474.85) 15963.14,10478.34 ; 15961.72,10474.89 cw(c15966.72,10474.85) 15963.14,10478.34 ; 15961.72,10474.89 cw(c15966.72,10474.85) 15963.14,10478.34 ; 15961.72,10474.89 cw(c15966.72,10474.85) 15963.14,10478.34 ; 15961.72,10474.89 cw(c15966.72,10474.85) 15963.14,10478.34 ; 15961.72,10474.89 cw(c15966.72,10474.85) 15963.14,10478.34 ; 15961.72,10474.89 cw(c15966.72,10474.85) 15963.14,10478.34 ; 15961.72,10474.89 cw(c15966.72,10474.85) 15963.14,10478.34 ; 15963.2,9713.53 ccw(c16018.57,9713.62) 16018.36,9658.24 ; 15963.2,9713.53 ccw(c16018.57,9713.62) 16018.36,9658.24 ; 15963.2,9713.53 ccw(c16018.57,9713.62) 16018.36,9658.24 ; 15963.2,9713.53 ccw(c16018.57,9713.62) 16018.36,9658.24 ; 15963.2,9713.53 ccw(c16018.57,9713.62) 16018.36,9658.24 ; 15963.2,9713.53 ccw(c16018.57,9713.62) 16018.36,9658.24 ; 15963.2,9713.53 ccw(c16018.57,9713.62) 16018.36,9658.24 ; 15963.2,9713.53 ccw(c16018.57,9713.62) 16018.36,9658.24 ; 15963.2,9713.53 ccw(c16018.57,9713.62) 16018.36,9658.24 ; 15963.2,9713.53 ccw(c16018.57,9713.62) 16018.36,9658.24 ; 15963.2,9713.53 ccw(c16018.57,9713.62) 16018.36,9658.24 ; 15963.2,9713.53 ccw(c16018.57,9713.62) 16018.36,9658.24 ; 15963.2,9713.53 ccw(c16018.57,9713.62) 16018.36,9658.24 ; 15963.2,9713.53 ccw(c16018.57,9713.62) 16018.36,9658.24 ; 15963.2,9713.53 ccw(c16018.57,9713.62) 16018.36,9658.24 ; 15963.2,9713.53 ccw(c16018.57,9713.62) 16018.36,9658.24 ; 16297.67,9657.96 ccw(c16297.65,9662.96) 16301.14,9659.38 ; 16297.67,9657.96 ccw(c16297.65,9662.96) 16301.14,9659.38 ; 16297.67,9657.96 ccw(c16297.65,9662.96) 16301.14,9659.38 ; 16297.67,9657.96 ccw(c16297.65,9662.96) 16301.14,9659.38 ; 16297.67,9657.96 ccw(c16297.65,9662.96) 16301.14,9659.38 ; 16297.67,9657.96 ccw(c16297.65,9662.96) 16301.14,9659.38 ; 16297.67,9657.96 ccw(c16297.65,9662.96) 16301.14,9659.38 ; 16297.67,9657.96 ccw(c16297.65,9662.96) 16301.14,9659.38 ; 16297.67,9657.96 ccw(c16297.65,9662.96) 16301.14,9659.38 ; 16297.67,9657.96 ccw(c16297.65,9662.96) 16301.14,9659.38 ; 16297.67,9657.96 ccw(c16297.65,9662.96) 16301.14,9659.38 ; 16297.67,9657.96 ccw(c16297.65,9662.96) 16301.14,9659.38 ; 16297.67,9657.96 ccw(c16297.65,9662.96) 16301.14,9659.38 ; 16297.67,9657.96 ccw(c16297.65,9662.96) 16301.14,9659.38 ; 16297.67,9657.96 ccw(c16297.65,9662.96) 16301.14,9659.38 ; 16297.67,9657.96 ccw(c16297.65,9662.96) 16301.14,9659.38 ; 16349.54,10168.26 ccw(c16354.54,10168.26) 16351.01,10164.72 ; 16349.54,10168.26 ccw(c16354.54,10168.26) 16351.01,10164.72 ; 16349.54,10168.26 ccw(c16354.54,10168.26) 16351.01,10164.72 ; 16349.54,10168.26 ccw(c16354.54,10168.26) 16351.01,10164.72 ; 16349.54,10168.26 ccw(c16354.54,10168.26) 16351.01,10164.72 ; 16349.54,10168.26 ccw(c16354.54,10168.26) 16351.01,10164.72 ; 16349.54,10168.26 ccw(c16354.54,10168.26) 16351.01,10164.72 ; 16349.54,10168.26 ccw(c16354.54,10168.26) 16351.01,10164.72 ; 16349.54,10168.26 ccw(c16354.54,10168.26) 16351.01,10164.72 ; 16349.54,10168.26 ccw(c16354.54,10168.26) 16351.01,10164.72 ; 16349.54,10168.26 ccw(c16354.54,10168.26) 16351.01,10164.72 ; 16349.54,10168.26 ccw(c16354.54,10168.26) 16351.01,10164.72 ; 16349.54,10168.26 ccw(c16354.54,10168.26) 16351.01,10164.72 ; 16349.54,10168.26 ccw(c16354.54,10168.26) 16351.01,10164.72 ; 16349.54,10168.26 ccw(c16354.54,10168.26) 16351.01,10164.72 ; 16349.54,10168.26 ccw(c16354.54,10168.26) 16351.01,10164.71 ; 16351.01,10164.71 16363.94,10151.74 ; 16363.94,10151.74 cw(c16360.4,10148.21) 16365.4,10148.3 ; 16363.94,10151.74 cw(c16360.4,10148.21) 16365.4,10148.3 ; 16363.94,10151.74 cw(c16360.4,10148.21) 16365.4,10148.3 ; 16363.94,10151.74 cw(c16360.4,10148.21) 16365.4,10148.3 ; 16363.94,10151.74 cw(c16360.4,10148.21) 16365.4,10148.3 ; 16363.94,10151.74 cw(c16360.4,10148.21) 16365.4,10148.3 ; 16363.94,10151.74 cw(c16360.4,10148.21) 16365.4,10148.3 ; 16363.94,10151.74 cw(c16360.4,10148.21) 16365.4,10148.3 ; 16363.94,10151.74 cw(c16360.4,10148.21) 16365.4,10148.3 ; 16363.94,10151.74 cw(c16360.4,10148.21) 16365.4,10148.3 ; 16363.94,10151.74 cw(c16360.4,10148.21) 16365.4,10148.3 ; 16363.94,10151.74 cw(c16360.4,10148.21) 16365.4,10148.3 ; 16363.94,10151.74 cw(c16360.4,10148.21) 16365.4,10148.3 ; 16363.94,10151.74 cw(c16360.4,10148.21) 16365.4,10148.3 ; 16363.94,10151.74 cw(c16360.4,10148.21) 16365.4,10148.3 ; 16363.94,10151.74 cw(c16360.4,10148.21) 16365.4,10148.3
  Bottom 6+gnd w5: U2.39@16365.16,10236.22 v1@16365.16,10298.06
UI_MISO: IC4.2 R76.1 | length 2893.4
  Top Layer 1 w5: IC4.2@17311.54,11260.94 17311.54,11217.28 v1(17312.63,11216.18) ; R76.1@19345.28,10703.82 19410.59,10703.82 v1(19411.14,10704.37)
  Unused w5: v1(17312.63,11216.18) 17312.63,11219.09 17318.94,11225.4 17318.94,11231.33 17645.55,11557.94 18472.31,11557.94 18623.15,11407.1 18623.15,11281.34 ; 18635.28,10852.54 18635.28,11007.04 ; 18820,11281.34 18907.48,11193.86 18907.48,11082.39 18832.13,11007.04 ; 18832.13,10852.54 18871.61,10813.07 18965.75,10813.07 19074.44,10704.37 v1(19411.14,10704.37)
USB_FS_DM: IC1.103 R136.1 | length 4335.2
  Top Layer 1 w5: IC1.103@16860.91,11134.88 16904.81,11134.88 16909.65,11130.04 v1(16911.3,11130.04) ; R136.1@19921.18,12670 19950,12670 19980,12700 v1(19980,12720)
  Layer 3 w5: v1(16911.3,11130.04) 16913.35,11132.1 16918.33,11132.1 16919.6,11133.37 16955.99,11133.37 17208.15,11385.53 17208.15,11385.83 17422.78,11600.46 ; 17619.63,11600.46 19072.34,11600.46 19152.34,11680.46 19465.57,11680.46 19537.55,11752.45 19922.45,11752.45 20118.97,11948.97 20118.97,12602.78 20001.74,12720 v1(19980,12720)
USB_FS_DP: IC1.104 R135.1 | length 4303.4
  Top Layer 1 w5: IC1.104@16860.91,11154.57 16861.51,11155.17 16909.69,11155.17 v1(16910.29,11155.77) ; R135.1@19921.18,12770 19923.67,12767.52 19972.48,12767.52 20000,12740 v1(20000,12700)
  Layer 3 w5: v1(16910.29,11155.77) 16913.2,11155.77 16920.21,11148.76 16956.94,11148.76 17423.28,11615.1 ; 17620.13,11615.1 19066.28,11615.1 19146.28,11695.1 19459.5,11695.1 19527.2,11762.8 19912.1,11762.8 20104.33,11955.03 20104.33,12595.67 v1(20000,12700)
USB_FS_SOF: IC1.100 TP9.1 | length 4220.9
  Top Layer 1 w5: v1(16807.61,11078.28) 16808.83,11077.05 16859.68,11077.05 IC1.100@16860.91,11075.83
  Layer 3 w5: v1(16807.61,11078.28) 16852.49,11123.16 16852.49,11133.86 16899.78,11181.15 16920.8,11181.15 16933.19,11168.76 16948.09,11168.76 17414.43,11635.1 ; 17611.28,11635.1 19057.99,11635.1 19142.32,11719.43 19449.43,11719.43 19512.8,11782.8 19897.69,11782.8 20080,11965.11 20080,12480 19990,12570 TP9.1@19925,12570
USB_FS_VBUS: H2.4 IC1.101 TP11.1 | length 4612.7
  Top Layer 1 w5: IC1.101@16860.91,11095.51 16862.03,11096.64 16916.31,11096.64 16933.1,11113.43 16944.38,11113.43 v5(16944.61,11113.66) ; TP11.1@16939.61,11118.66 TP11.1@16939.61,11128.66
  Layer 3 w5: v5(16944.61,11113.66) 16943.6,11114.67 16904.93,11114.67 16894.92,11124.68 16894.92,11162.14 16903.92,11171.15 16916.66,11171.15 16929.04,11158.76 16952.8,11158.76 17419.14,11625.1 ; 17615.99,11625.1 19062.14,11625.1 19145.86,11708.82 19453.82,11708.82 19517.8,11772.8 19902.69,11772.8 20090.61,11960.71 20090.61,12579.39 19800,12870 H2.4@19749.81,12870
V_BAT: C97.2 IC20.2 L2.2 Q3.2 R21.2 R52.2 R125.2 TP15.1 | length 1766.8
  Top Layer 1 w10: 20509.61,13084.96 20594.65,13170 R125.2@20669.06,13170 20674.65,13175.59 20674.65,13200 20684.65,13210 20904.65,13210 20944.65,13170 21199.89,13170 21219.89,13150 v2(21224.65,13150) ; v2(20949.65,12860) 20992.2,12860 R21.2@20992.83,12859.37 20992.83,12835.67 20978.02,12820.85 Q3.2@20978.02,12789.37 ; R52.2@21155.83,12990 v2(21194.65,12990)
  Top Layer 1 w25: IC20.2@20384.02,12952.4 C97.2@20384.02,13029.37 ; C97.2@20384.65,13030 20463.96,13030 L2.2@20466.61,13027.34 ; 20430.63,12950 20460.63,12950 ; 20450.63,13140 20490.63,13100
  Bottom 6+gnd w10: v2(20949.65,12860) 21166.48,12860 21224.65,12918.16 21224.65,12960 v2(21194.65,12990) 21224.65,13020 v2(21224.65,13150)
V_USB: D2.1 H2.1 H2.2 H2.3 IC20.1 R11.2 TP12.1 | length 1577.1
  Top Layer 1 w10: v2(20347.5,12840) 20381.96,12840 20383.44,12838.51 ; v2(20347.5,12918.02) 20373.95,12891.57 20373.95,12887.66 IC20.1@20383.85,12877.76 ; v2(20347.75,12878.56) 20347.96,12878.35 20382.83,12878.35 20383.6,12877.57 20383.79,12877.76 IC20.1@20383.85,12877.76 ; D2.1@20352.65,12762.1 20353.62,12762.1 20358.55,12762.1 20409.47,12711.18 R11.2@20439.65,12711.18 ; IC20.1@20384.02,12877.6 IC20.1@20383.85,12877.76
  Top Layer 1 w25: D2.1@20353.62,12762.1 20383.44,12791.92 20383.44,12838.51 IC20.1@20383.44,12877.03 ; IC20.1@20383.47,12878.09 IC20.1@20383.79,12877.76
  Layer 3 w25: TP12.1@18847.89,12700.05 19104.81,12956.98 19104.81,12990.7 19134.1,13019.99 19175.52,13019.99 19225.53,13070 H2.2@19749.81,13070
  Bottom 6+gnd w10: v2@20339.65,12880 20341.09,12878.56 v2(20347.75,12878.56)
  Bottom 6+gnd w40: 20223.08,12850 20309.65,12850 v2@20339.65,12880
pads on no net: ENC1.MT1 ENC1.MT2 ENC2.MT1 ENC2.MT2 ENC3.MT1 ENC3.MT2 ENC4.MT1 ENC4.MT2 ENC5.MT1 ENC5.MT2 H3.4 H3.5 H3.6 H3.7 H3.17 H3.18 H3.35 H3.36 H3.37 H3.38 H3.39 H3.40 H3.MP1 H7.1 H7.2 H7.3 H7.4 H7.5 H7.6 IC1.6 IC1.7 IC1.95 IC1.117 IC1.143 IC2.6 IC2.9 IC2.26 IC2.27 IC2.28 IC2.35 IC2.40 IC2.41 IC2.42 IC2.45 IC2.46 IC2.47 IC2.48 IC2.69 IC2.70 IC2.87 IC2.88 IC2.92 IC2.95 IC2.96 IC2.98 IC2.100 IC2.116 IC2.117 IC2.118 IC2.119 IC2.122 IC2.127 IC2.128 IC2.129 IC2.134 IC2.137 IC2.143 IC8.2 IC8.3 IC8.4 IC14.6 IC14.7 IC14.8 IC14.9 IC14.11 IC14.12 IC14.13 IC14.14 IC15.7 IC16.7 IC17.7 IC17.10 IC21.6 J1.31@15477.48,12376.18 J1.32@16808.19,12376.18 J3.13 J3.14 J4.13 J4.14 J20. J20.S1 J20.S2 J20.S3 J20.S4 JK1.1 JK1.3 JK1.6 JK2.1 JK2.3 JK2.6 JK3.1 JK3.3 JK3.6 MH1.0 MH2.0 MH3.0 MH4.0 MH5.0 MH6.0 MH7. MH8.0 PJ1.3 PJ1.5 PJ1.7 PJ1.23 PJ1.25 PJ1.27 PJ2.3 PJ2.5 PJ2.7 PJ2.23 PJ2.25 PJ2.27 R37.2 R37.3 R37.MT1 SW1. SW2. SW3. SW4. SW5. SW6. SW6.1 SW7. SW8. U1.36 U1.40 U2.36 U2.40 U3.36 U3.40 U4.36 U4.40 U6.3
copper on no net: | length 5214.7
  Top Layer 1 w5: 13823.78,11360.55 14203.78,11360.55 ; 14461.48,10139.04 14516.6,10139.04 14516.48,10139.16 14516.48,10213.49 14515.48,10214.49 v1(14515.48,10269.26) ; v1(14627.6,10108.14) 14628.02,10108.56 14628.02,10118.51 14631.48,10121.98 14631.48,10153.76 ; 14706.99,10717.47 14707.15,10717.31 ; 16015.39,11115.2 16059.7,11115.2 v1(16089.16,11085.73)
  Top Layer 1 w8: v1(14516.48,10080.26) 14516.48,10111.36 14516.6,10111.48
  Top Layer 1 w25: 19658.83,13044.99 19658.83,13082.34 19666.48,13089.99
  Unused w5: v1(16209.02,10915.04) 16681.08,10915.04 16758.39,10992.34 16811.83,10992.34 16876.31,10927.86 16943.05,10927.86 17074.44,11059.25 17074.44,11165.94 17148.46,11239.96 17299.3,11239.96 17637.27,11577.94 18484.03,11577.94 18643.15,11418.82 18643.15,11289.62 ; 18655.28,10886.68 18655.28,10997.89 ; 18840,11289.62 18928.77,11200.86 18928.77,11074.52 18852.13,10997.89 ; 18852.13,10886.68 18884.63,10854.19 18904.63,10854.19 18915,10843.82 18955,10843.82 19050,10748.82 v1(19085,10748.82)
  Layer 3 w5: 15163.92,9718.23 15167.15,9715 15167.15,9691.03 ; 15194.85,9729.63 15198.62,9725.86 15198.62,9703.04 15199.85,9701.81 15199.85,9689.63 ; 15354.85,9689.63 15356.06,9690.84 15356.06,9720.15 ; 15387.78,9726.7 15387.78,9715.77 15387.7,9715.68 15387.7,9691.78 15389.85,9689.63 ; v1(16089.16,11085.73) 16136.24,11085.73 16209.02,11012.95 v1(16209.02,10915.04) ; 16472.22,9722.42 16475.45,9719.19 16475.45,9695.22 ; 16503.15,9733.82 16506.92,9730.05 16506.92,9707.23 16508.15,9706 16508.15,9693.82 ; 16663.15,9693.82 16664.36,9695.03 16664.36,9724.34 ; 16696.08,9730.89 16696.08,9719.96 16696,9719.87 16696,9695.97 16698.15,9693.82
  Bottom 6+gnd w5: 14453.48,10371.26 14514.48,10310.26 14514.48,10270.26 v1(14515.48,10269.26)
  other v3: 16355.24,10701.2
  other v5: 16283.15,11388.82

## Polygon pours and split planes (outlines as drawn)
GND on Layer 3 "GND_L03_P027" (solid, remove dead copper, pour order 27): 16011.74,11974.96 17405,11974.96 17405,10163.93 16011.74,10163.93
GND on Layer 3 "GND_L03_P026" (solid, remove dead copper, pour order 26): 15933.81,11973.01 14566.25,11973.01 14566.25,10161.99 15933.81,10161.99